# EAGLE board sensor (EAGLE 9.4.2)

Size 100 x 80 mm. Coordinates in mm from the lower left corner, seen from the top.
Outline: 0,0 100,0 100,80 0,80 0,0
Copper layers (1*16): Top 0.035mm / dielectric 1.5mm / Bottom 0.035mm
Design rules "default": minimum track width 6mil, minimum drill 0.35mm, track to track 6mil, track to pad 6mil, pad to pad 6mil, via to via 6mil, smd to smd 6mil, copper to edge 40mil, drill to drill 6mil, minimum pad ring 10mil, minimum via ring 8mil, stop-mask expansion 4mil, vias tented up to drill 0mil, thermal gap 10mil

## Footprints (pad centres in the part's own frame; a part is rotated, then mirrored left to right if it is on the bottom)
05P = drill 0.914 long: 1 -5.08,0; 2 -2.54,0; 3 0,0; 4 2.54,0; 5 5.08,0
1X03 = drill 1.016: 1 -2.54,0; 2 0,0; 3 2.54,0
03P = drill 0.914 long: 1 -2.54,0; 2 0,0; 3 2.54,0
1X13 = drill 1.016 long: 1 -15.24,0; 2 -12.7,0; 3 -10.16,0; 4 -7.62,0; 5 -5.08,0; 6 -2.54,0; 7 0,0; 8 2.54,0; 9 5.08,0; 10 7.62,0; 11 10.16,0; 12 12.7,0; 13 15.24,0
AC01 = drill 1.1 pad 2: 1 -8.9,0; 2 8.9,0
02P = drill 0.914 long: 1 -1.27,0; 2 1.27,0

## Placement (x,y rotation side)
CSM  [05P]  67.31,34.29 0 top
DHT22  [1X03]  39.37,33.02 180 top
DS18B20  [03P]  90.17,34.29 0 top
JP1  [1X13]  76.2,17.78 0 top
JP2  [1X13]  34.29,63.5 0 top
JP3  [1X13]  34.29,52.07 0 top
R1  4.7K  [AC01]  86.36,46.99 180 top
SW_MODE  [02P]  81.28,6.35 0 top
SW_PGM  [02P]  52.07,6.35 0 top
SW_RST  [02P]  66.04,6.35 0 top

## Library data of the parts
CSM DS18B20 SW_MODE SW_PGM SW_RST = con-amp-quick; OC_FARNELL: unknown; OC_NEWARK: unknown
DHT22 JP1-JP3 = adafruit
R1 = resistor-power; OC_FARNELL: unknown; OC_NEWARK: unknown

## Nets
1WIRE: DS18B20.2 R1.2
3.3V: CSM.1 DHT22.1 DS18B20.3 JP2.7 JP2.11 JP3.7 JP3.11 R1.1
AOUT1: CSM.5 JP1.10
AOUT2: CSM.4 JP1.8
DATA_T: DHT22.2 JP2.9 JP3.9
GND: CSM.2 DHT22.3 DS18B20.1 JP2.6 JP2.8 JP3.6 JP3.8 SW_MODE.1 SW_PGM.1 SW_RST.1
MODE: JP1.9 SW_MODE.2
N$1: JP2.1 JP3.1
N$2: CSM.3
N$3: JP1.11
N$4: JP2.2 JP3.2
N$6: JP2.3 JP3.3
N$7: JP2.4 JP3.4
N$13: JP2.10 JP3.10
N$15: JP2.12 JP3.12
N$16: JP2.13 JP3.13
PGM: JP2.5 JP3.5 SW_PGM.2
RST: JP1.3 SW_RST.2

## Tracks (layer width: path | path; a pad name or v marks a point on that pad's centre or on a via)
1WIRE  (1 unrouted)
3.3V  (7 unrouted)
AOUT1  (1 unrouted)
AOUT2  (1 unrouted)
DATA_T  (2 unrouted)
GND  (9 unrouted)
MODE  (1 unrouted)
N$1  (1 unrouted)
N$4  (1 unrouted)
N$6  (1 unrouted)
N$7  (1 unrouted)
N$13  (1 unrouted)
N$15  (1 unrouted)
N$16  (1 unrouted)
PGM  (2 unrouted)
RST  (1 unrouted)